# Altium PCB COF.PcbDoc (part 3 of 5)
Units mm, origin at the board's own origin, x right, y up, seen from the top; angles counter-clockwise.
Board outline 42.1 x 32.68 mm, 2 copper layers (TOP, BOTTOM), stack 0.321 mm thick; 42 components, 54 nets, 189 pads, 156 vias.
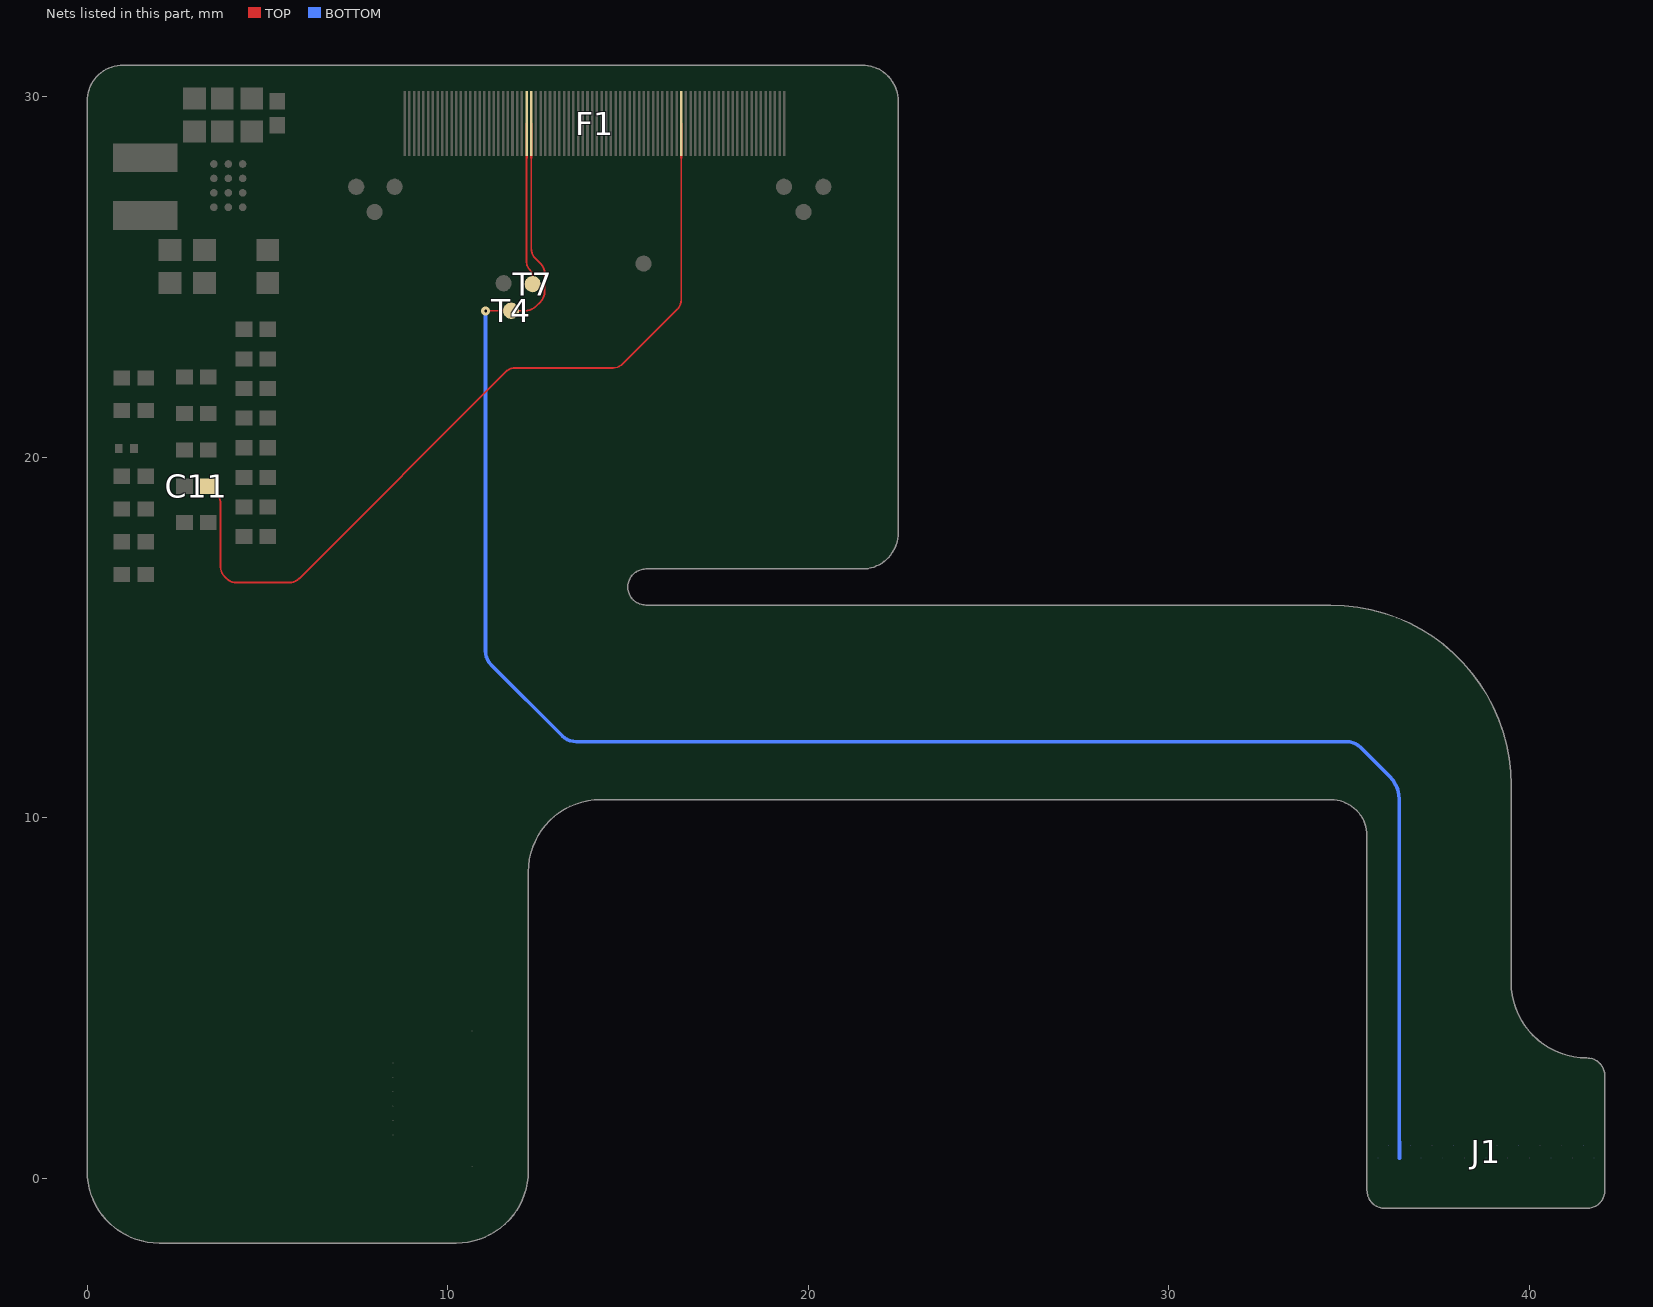
[diagram p2: the nets of this part, all layers, seen from the top]

## Via types
v1: diameter 0.25, hole 0.075, TOP to BOTTOM, tented both sides, 156 vias

## Nets (pads, with @x,y where several pads share a name; then routed paths per layer and width w, separated by ;. In a path a pad name is that pad's centre, name@x,y a point inside that pad or via, vN(x,y) a via of type N, cw(c..) or ccw(c..) an arc to the next point about the centre after c; other vN are vias at no path point) (continued)
VOTP: F1.28 J1.19 T4.1 | length 53.4
  TOP w0.05: v1(11.057,24.056) 11.061,24.06 T4.1@11.761,24.06 12.148,24.06 ccw(c12.148,24.492) 12.453,24.187 12.579,24.313 ccw(c12.307,24.585) 12.692,24.585 12.692,25.098 ccw(c12.307,25.098) 12.579,25.37 12.435,25.514 cw(c12.706,25.787) 12.321,25.787 12.321,28.301
  TOP w0.07: 12.321,28.301 F1.28@12.321,29.251
  BOTTOM w0.1: v1(11.057,24.056) ccw(c11.602,23.983) 11.052,23.984 11.052,14.623 ccw(c11.602,14.623) 11.212,14.235 13.178,12.269 13.18,12.267 ccw(c13.567,12.658) 13.567,12.108 34.94,12.108 34.942,12.108 cw(c34.94,11.558) 35.328,11.948 36.129,11.147 cw(c35.473,10.493) 36.399,10.494 36.399,1.527 J1.19@36.407,0.557
VREF: C11.1 F1.60 | length 23.5
  TOP w0.05: C11.1@3.363,19.192 3.568,19.007 3.589,18.986 cw(c3.317,18.713) 3.702,18.713 3.702,16.958 ccw(c4.087,16.958) 3.814,16.687 3.87,16.631 ccw(c4.141,16.904) 4.141,16.519 5.608,16.519 ccw(c5.608,16.904) 5.88,16.631 11.613,22.364 cw(c11.885,22.092) 11.885,22.477 14.589,22.477 ccw(c14.589,22.862) 14.861,22.589 16.369,24.098 ccw(c16.096,24.369) 16.481,24.369 16.481,28.301
  TOP w0.07: 16.481,28.301 F1.60@16.481,29.251
VREGOUT: F1.27 T7.1 | length 4.5
  TOP w0.05: 12.191,28.301 12.192,25.674 12.192,25.413 ccw(c12.495,25.413) 12.281,25.198 cw(c12.085,25.002) 12.362,25.002 T7.1@12.362,24.798
  TOP w0.07: 12.191,28.301 12.191,28.351 12.191,28.386 F1.27@12.191,29.251
pads on no net: F1.6 F1.11 F1.46 F1.50 F1.51 F1.52 F1.53 F1.54 F1.55 F1.72 F1.74 F1.77 J1.16

## Polygon pours and split planes (outlines as drawn)
GND on TOP "BOTTOM-No Net 1" (solid, pour order 21): 0.102,0.197 0.102,29.876 cw(c1,29.876) 1,30.774 21.5,30.774 cw(c21.5,29.876) 22.398,29.876 22.398,17.897 cw(c21.5,17.897) 21.5,16.999 15.5,16.999 ccw(c15.5,16.397) 15.731,15.841 15.731,11.702 14.619,10.591 ccw(c14.34,8.754) 14.062,10.591 ccw(c14.24,8.497) 12.138,8.497 12.138,0.197 cw(c10.24,0.197) 10.24,-1.701 2,-1.701 cw(c2,0.197)
GND on TOP "BOTTOM-No Net" (hatched 45Degree grid 0.508 track 0.203, pour order 22): 14.627,10.599 15.642,11.614 15.643,11.614 ccw(c15.5,11.757) 15.702,11.757 15.702,15.795 34.504,15.795 cw(c34.504,10.897) 39.403,10.897 39.403,5.434 ccw(c41.604,5.434) 41.604,3.232 cw(c41.604,2.834) 42.003,2.834 42.003,-0.341 cw(c41.604,-0.341) 41.604,-0.74 36.004,-0.74 cw(c36.004,-0.341) 35.606,-0.341 35.606,9.497 ccw(c34.504,9.497) 34.504,10.599
ELVDD on TOP "ELVDD_L01_P017" (solid, pour order 17): 1.992,26.047 2.8,26.047 2.8,26.8 3.004,26.961 3.122,27.03 3.583,27.03 3.583,25.437 1.992,25.437
ELVSS on TOP "ELVSS_L01_P014" (solid, pour order 14): 3.814,28.128 3.436,28.506 3.436,28.722 3.436,29.332 4.887,29.332 4.888,29.331 4.887,28.344 4.128,28.344 4.024,28.241 4.024,28.128
VCI on TOP "VCI_L01_P010" (solid, pour order 10): 4.451,27.174 6.42,27.281 6.42,26.892 5.33,26.504 5.33,25.446 4.7,25.446 4.7,26.828 4.451,26.828
VBAT on TOP "VBAT_L01_P013" (solid, pour order 13): 4.32,28.234 4.852,28.234 4.972,28.602 4.973,29.438 5.07,29.438 5.49,29.438 5.49,28.978 5.49,28.399 5.115,28.024 4.32,28.024
GND on TOP "GND_L01_P023" (solid, pour order 23): 3.7,25.2 4.569,25.2 4.569,26.698 3.7,26.698
NetL1_2 on TOP "NETL1_2_L01_P016" (solid, pour order 16): 3.512,27.438 3.507,27.432 2.596,27.432 2.268,27.104 0.71,27.104 0.71,26.304 2.596,26.304 2.596,26.942 2.839,27.23 3.507,27.23
VBAT on TOP "VBAT_L01_P012" (solid, pour order 12): 3.51,28.231 3.289,28.452 3.289,29.33 2.659,29.33 2.519,29.19 2.098,29.19 2.098,28.899 2.765,28.899 2.765,28.373 3.117,28.021 3.51,28.021
NetL1_1 on TOP "NETL1_1_L01_P015" (solid, pour order 15): 3.535,27.832 3.535,27.831 3.053,27.831 2.532,28.352 2.532,28.698 0.732,28.698 0.732,27.898 2.386,27.898 2.662,27.621 3.535,27.621
no net on Layer0 "Default Coverlay 4 Bottom" (split plane): 2,-1.803 10.437,-1.803 10.823,-1.726 11.187,-1.575 11.515,-1.357 11.794,-1.078 12.012,-0.75 12.163,-0.386 12.24,0 12.24,0.197 12.24,8.497 12.25,8.693 12.326,9.078 12.476,9.44 12.694,9.766 12.971,10.043 13.297,10.261 13.659,10.411 14.044,10.487 14.24,10.497 34.504,10.497 34.603,10.492 34.795,10.454 34.976,10.379 35.139,10.27 35.278,10.131 35.386,9.968 35.461,9.787 35.5,9.595 35.504,9.497 35.504,-0.341 35.504,-0.441 35.581,-0.624 35.721,-0.765 35.905,-0.841 36.004,-0.841 41.604,-0.841 41.704,-0.841 41.888,-0.765 42.028,-0.624 42.104,-0.441 42.104,-0.341 42.104,2.834 42.104,2.933 42.028,3.117 41.888,3.258 41.704,3.334 41.604,3.334 41.399,3.344 40.995,3.424 40.615,3.582 40.272,3.81 39.981,4.102 39.752,4.444 39.595,4.824 39.515,5.228 39.504,5.434 39.504,10.897 39.504,11.225 39.419,11.875 39.249,12.508 38.998,13.113 38.671,13.681 38.272,14.201 37.808,14.664 37.288,15.063 36.721,15.391 36.115,15.642 35.482,15.811 34.832,15.897 34.504,15.897 15.5,15.897 15.402,15.907 15.222,15.981 15.084,16.119 15.01,16.299 15.01,16.495 15.084,16.675 15.222,16.813 15.402,16.887 15.5,16.897 21.5,16.897 21.599,16.897 21.792,16.935 21.974,17.011 22.137,17.12 22.277,17.26 22.386,17.423 22.462,17.605 22.5,17.798 22.5,29.974 22.462,30.167 22.386,30.349 22.277,30.513 22.137,30.652 21.974,30.762 21.792,30.837 21.599,30.876 21.5,30.876 1,30.876 0.902,30.876 0.708,30.837 0.526,30.762 0.363,30.652 0.223,30.513 0.114,30.349 0.038,30.167 0,29.974 0,29.876 0,0.197 0,0 0.077,-0.386 0.228,-0.75 0.447,-1.078 0.725,-1.357 1.053,-1.575 1.417,-1.726 1.803,-1.803
GND on BOTTOM "BOTTOM-No Net 1" (solid, remove dead copper, pour order 19): 0.102,0.197 0.102,29.876 cw(c1,29.876) 1,30.774 21.5,30.774 cw(c21.5,29.876) 22.398,29.876 22.398,17.897 cw(c21.5,17.897) 21.5,16.999 15.5,16.999 ccw(c15.5,16.397) 15.785,15.867 15.785,11.757 14.619,10.591 ccw(c14.34,8.752) 14.062,10.591 ccw(c14.24,8.497) 12.138,8.497 12.138,0.197 cw(c10.24,0.197) 10.24,-1.701 2,-1.701 cw(c2,0.197)
GND on BOTTOM "BOTTOM-No Net" (hatched 45Degree grid 0.508 track 0.203, remove dead copper, pour order 20): 14.627,10.599 15.642,11.614 15.643,11.614 ccw(c15.5,11.757) 15.702,11.757 15.702,15.795 34.504,15.795 cw(c34.504,10.897) 39.403,10.897 39.403,5.434 ccw(c41.604,5.434) 41.604,3.232 cw(c41.604,2.834) 42.003,2.834 42.003,-0.341 cw(c41.604,-0.341) 41.604,-0.74 36.004,-0.74 cw(c36.004,-0.341) 35.606,-0.341 35.606,9.497 ccw(c34.504,9.497) 34.504,10.599
no net on Layer0 "Default Coverlay 4 Top" (split plane): 2,-1.803 10.437,-1.803 10.823,-1.726 11.187,-1.575 11.515,-1.357 11.794,-1.078 12.012,-0.75 12.163,-0.386 12.24,0 12.24,0.197 12.24,8.497 12.25,8.693 12.326,9.078 12.476,9.44 12.694,9.766 12.971,10.043 13.297,10.261 13.659,10.411 14.044,10.487 14.24,10.497 34.504,10.497 34.603,10.492 34.795,10.454 34.976,10.379 35.139,10.27 35.278,10.131 35.386,9.968 35.461,9.787 35.5,9.595 35.504,9.497 35.504,-0.341 35.504,-0.441 35.581,-0.624 35.721,-0.765 35.905,-0.841 36.004,-0.841 41.604,-0.841 41.704,-0.841 41.888,-0.765 42.028,-0.624 42.104,-0.441 42.104,-0.341 42.104,2.834 42.104,2.933 42.028,3.117 41.888,3.258 41.704,3.334 41.604,3.334 41.399,3.344 40.995,3.424 40.615,3.582 40.272,3.81 39.981,4.102 39.752,4.444 39.595,4.824 39.515,5.228 39.504,5.434 39.504,10.897 39.504,11.225 39.419,11.875 39.249,12.508 38.998,13.113 38.671,13.681 38.272,14.201 37.808,14.664 37.288,15.063 36.721,15.391 36.115,15.642 35.482,15.811 34.832,15.897 34.504,15.897 15.5,15.897 15.402,15.907 15.222,15.981 15.084,16.119 15.01,16.299 15.01,16.495 15.084,16.675 15.222,16.813 15.402,16.887 15.5,16.897 21.5,16.897 21.599,16.897 21.792,16.935 21.974,17.011 22.137,17.12 22.277,17.26 22.386,17.423 22.462,17.605 22.5,17.798 22.5,29.974 22.462,30.167 22.386,30.349 22.277,30.513 22.137,30.652 21.974,30.762 21.792,30.837 21.599,30.876 21.5,30.876 1,30.876 0.902,30.876 0.708,30.837 0.526,30.762 0.363,30.652 0.223,30.513 0.114,30.349 0.038,30.167 0,29.974 0,29.876 0,0.197 0,0 0.077,-0.386 0.228,-0.75 0.447,-1.078 0.725,-1.357 1.053,-1.575 1.417,-1.726 1.803,-1.803

## Keep-outs
Keep-Out Layer:
  circle w0.006: c6.12,-1.803 r0.003
  circle w0.006: c6.12,-1.803 r0.003
  lines w0.013: 36.004,-0.841 cw(c36.004,-0.341) 35.504,-0.341 35.504,2.159 35.504,9.497 ccw(c34.504,9.497) 34.504,10.497 14.24,10.497 ccw(c14.24,8.497) 12.24,8.497 12.24,0.197 cw(c10.24,0.197) 10.24,-1.803 2,-1.803 cw(c2,0.197) 0,0.197 0,29.876 cw(c1,29.876) 1,30.876 21.5,30.876 cw(c21.5,29.876) 22.5,29.876 22.5,17.897 cw(c21.5,17.897) 21.5,16.897 15.5,16.897 ccw(c15.5,16.397) 15.5,15.897 34.504,15.897 cw(c34.504,10.897) 39.504,10.897 39.504,5.434 ccw(c41.604,5.434) 41.604,3.334 cw(c41.604,2.834) 42.104,2.834 42.104,-0.341 cw(c41.604,-0.341) 41.604,-0.841 ; 36.004,-0.841 41.604,-0.841 ; 36.004,-0.841 41.604,-0.841

## Other copper
TOP:
  pour cut-out: 6.6,30.873 22.5,30.873 22.5,28.299 6.6,28.299
  pour cut-out: 3.7,25.2 4.568,25.2 4.568,24.959 3.7,24.959
  pour cut-out: 0.715,27.903 2.3,27.903 2.3,27.103 0.715,27.103
  text "TOP" at 1,-11 h3.17
BOTTOM:
  pour cut-out: 35.657,1.429 41.947,1.429 41.947,-0.841 35.657,-0.841
  text "BOT" at 1,-14.5 h3.17

## Silkscreen, mask and mechanical layers (free items; w line width, h text height)
Top Overlay:
  region: 42.104,1.609 35.504,1.609 35.504,1.709 42.104,1.709
  lines w0.013: 35.505,2.649 42.105,2.649 ; 35.505,2.649 42.105,2.649 ; 35.505,2.649 42.105,2.649 ; 35.505,2.649 42.105,2.649 ; 35.505,2.649 42.105,2.649
  text "6" at 6.329,2.871 h1
  text "1" at 6.402,0.62 h1
  text "SILKTOP" at 6.955,-11.092 h3.17
Bottom Overlay:
  lines w0.013: 35.505,2.649 42.105,2.649
  text "21" at 36.1,1.904 h0.6
  text "1" at 41.906,1.904 h0.6
  text "SILKBOT" at 6.849,-14.592 h3.17
Top Paste:
  text "PASTETOP" at 19.147,-11.092 h3.17
Bottom Paste:
  text "PASTEBOT" at 19.041,-14.592 h3.17
Top Coverlay:
  region: 6.6,30.876 22.5,30.876 22.5,28.336 6.6,28.336
  text "MASKTOP" at 34.133,-11.092 h3.17
Bottom Coverlay:
  region: 36.004,-0.841 cw(c36.004,-0.341) 35.504,-0.341 35.504,1.709 42.104,1.709 42.104,-0.341 cw(c41.604,-0.341) 41.604,-0.841
  region: 6.296,-1.803 10.24,-1.803 10.24,-1.813 10.632,-1.774 11.009,-1.66 11.357,-1.474 11.661,-1.224 11.911,-0.92 12.097,-0.572 12.211,-0.195 12.25,0.197 12.24,6.076 6.296,6.076
  region: 0.5,15.376 10,15.376 10,26.276 0.5,26.276
  lines w0.013: 35.504,-0.341 ccw(c36.004,-0.341) 36.004,-0.841 41.604,-0.841 ccw(c41.604,-0.341) 42.104,-0.341 42.104,1.709 35.504,1.709 35.504,-0.341
  text "MASKBOT" at 34.027,-14.592 h3.17
Top Assembly:
  lines w0.025: -47.057,-15.667 -43.907,-15.667 ; -47.057,25.786 -43.907,25.786 ; -47.057,67.239 -43.907,67.239 ; -4.08,-60.244 -4.08,-57.094 ; -4.08,108.666 -4.08,111.841 ; 29.067,-60.244 29.067,-57.094 ; 29.067,108.666 29.067,111.841 ; 63.027,-60.244 63.027,-57.094 ; 63.027,108.666 63.027,111.841 ; 96.174,-60.244 96.174,-57.094 ; 96.174,108.666 96.174,111.841 ; 130.108,-60.244 130.108,-57.094 ; 130.108,108.463 130.108,111.638 ; 170.596,-15.667 173.771,-15.667 ; 170.596,25.786 173.771,25.786 ; 170.596,67.239 173.771,67.239 ; -43.78,-56.993 170.596,-56.993 170.596,108.666 -43.78,108.666 -43.78,-56.993
  lines w0.076: 103.819,-57.094 103.819,-37.358
  lines w0.152: 56.448,-55.113 76.184,-55.113 ; 56.448,-53.157 76.184,-53.157 ; 56.448,-51.176 76.184,-51.176 ; 56.448,-49.195 76.184,-49.195 ; 56.448,-47.239 76.184,-47.239 ; 56.448,-45.258 76.184,-45.258 ; 56.448,-43.277 76.184,-43.277 ; 56.448,-41.321 76.184,-41.321 ; 56.448,-39.34 76.184,-39.34 ; 56.448,-37.358 76.184,-37.358 ; 56.55,-37.358 56.55,-57.094 58.124,-57.094 ; 65.617,-55.113 65.617,-37.358 ; 76.184,-57.094 76.184,-37.358 ; 76.184,-40.127 103.819,-40.127 125.13,-40.127 ; 103.819,-54.326 118.043,-54.326 125.13,-54.326 ; 103.819,-51.582 118.043,-51.582 125.13,-51.582 ; 103.819,-48.407 118.043,-48.407 125.13,-48.407 ; 103.819,-45.664 118.043,-45.664 125.13,-45.664 ; 103.819,-42.896 125.13,-42.896 ; 121.65,104.729 170.596,104.729 ; 121.65,108.666 121.65,106.71 ; 124.825,102.748 124.825,106.71 ; 125.13,-57.094 125.13,-37.358 ; 125.206,-55.113 170.596,-55.113 ; 125.206,-51.582 170.596,-51.582 ; 125.206,-42.896 170.596,-42.896 ; 128.381,-55.113 128.381,-51.582 ; 133.105,-57.094 133.105,-55.113 ; 156.397,-57.094 156.397,-55.113 ; 156.397,102.748 156.397,106.71 ; 162.722,102.748 162.722,106.71 ; 166.659,-55.113 166.659,-51.582 ; 170.596,-37.358 76.184,-37.358 ; 170.596,102.748 121.65,102.748 121.65,106.71 ; 170.596,106.71 121.65,106.71
  lines w0.406: -47.844,-53.945 -47.844,-61.057 -40.732,-61.057 ; -47.844,105.517 -47.844,112.629 -40.732,112.629 ; 167.344,-61.361 174.456,-61.361 174.456,-54.249 ; 167.446,112.629 174.558,112.629 174.558,105.517
  lines w0.432: -43.78,-56.993 170.596,-56.993 170.596,108.666 -43.78,108.666 -43.78,-56.993
  text "6" at -20.844,109.073 h1.27
  text "5" at 12.684,109.073 h1.27
  text "4" at 45.069,109.073 h1.27
  text "3" at 79.587,109.073 h1.27
  text "2" at 113.725,109.073 h1.27
  text "1" at 145.5,109.073 h1.27
  text "REVISIONS" at 139.811,107.091 h0.76
  text "NOTES:" at -41.291,105.796 h1.02
  text "DESCRIPTION" at 132.724,105.517 h0.76
  text "DATE" at 157.184,105.517 h0.76
  text "APPROVAL" at 163.509,105.517 h0.76
  text "REV" at 122.259,105.313 h0.76
  text "'.TBApprovedBy'" at 163.306,103.358 h1.02
  text "'.TBRevision'" at 122.463,103.307 h0.76
  text "Initial Release" at 125.612,103.154 h0.76
  text "'.ModifiedDate'" at 156.778,103.154 h0.76
  text "1. ASSEMBLE IN ACCORDANCE WITH IPC-610 CLASS 2." at -40.745,102.672 h1.02
  text "D" at -46.473,81.234 h1.27
  text "D" at 171.205,81.234 h1.27
  text "C" at -46.651,39.985 h1.27
  text "C" at 171.002,39.985 h1.27
  text "B" at -46.651,1.91 h1.27
  text "B" at 171.002,1.91 h1.27
  text "ASSEMBLY TOP SIDE" at 4.005,-7.132 h3.17
  text "DATE" at 119.364,-38.705 h0.64
  text "A" at -46.854,-38.933 h1.27
  text "APPROVAL" at 104.225,-38.933 h0.64
  text "A" at 170.799,-38.933 h1.27
  text "SHM" at 127.898,-41.219 h1.6
  text "DRAWN" at 104.225,-41.321 h0.64
  text "'.ModifiedDate'" at 117.941,-42.337 h0.64
  text "'.TBDrawnBy'" at 104.225,-42.413 h0.64
  text "CHECKED" at 104.225,-44.064 h0.64
  text "'.Print_Date'" at 117.941,-45.232 h0.64
  text "'.TBApprovedBy'" at 104.225,-45.309 h0.64
  text "ASSEMBLY DRAWING,PCB," at 126.298,-45.563 h1.6
  text "RELEASED" at 104.225,-46.833 h0.64
  text "'.Print_Date'" at 117.941,-47.95 h0.64
  text ".TBDrawnBy" at 104.225,-48.026 h0.64
  text "'.TBTitle'" at 126.298,-48.179 h1.6
  text "XXXXXX" at 56.854,-52.548 h0.64
  text "REV" at 167.852,-52.548 h0.76
  text "SIZE" at 125.612,-52.751 h0.76
  text "DWG NO" at 128.762,-52.751 h0.76
  text "'.TBBoardNumber'-DWG" at 135.671,-53.945 h1.6
  text "A" at 126.4,-54.326 h0.76
  text "NEXT ASSY" at 57.083,-54.503 h0.64
  text "USED ON" at 68.462,-54.503 h0.64
  text "'.TBRevision'" at 167.268,-54.503 h1.6
  text "SCALE" at 125.612,-55.926 h0.76
  text "CUST:" at 133.308,-55.926 h0.76
  text "SHEET" at 157.184,-55.926 h0.76
  text "APPLICATION" at 62.392,-56.307 h0.64
  text "1:1" at 128.762,-56.307 h0.76
  text "1 OF 2" at 161.909,-56.307 h0.76
  text "1" at 147.786,-59.787 h1.27
  text "6" at -20.844,-59.863 h1.27
  text "5" at 12.684,-59.863 h1.27
  text "4" at 45.069,-59.863 h1.27
  text "3" at 79.587,-59.863 h1.27
  text "2" at 112.353,-59.863 h1.27
Bottom Assembly:
  lines w0.025: -46.955,-15.667 -43.78,-15.667 ; -46.955,25.786 -43.78,25.786 ; -46.955,67.239 -43.78,67.239 ; -3.293,-60.244 -3.293,-57.094 ; -3.293,108.463 -3.293,111.638 ; 30.642,-60.244 30.642,-57.094 ; 30.642,108.666 30.642,111.841 ; 63.789,-60.244 63.789,-57.094 ; 63.789,108.666 63.789,111.841 ; 97.748,-60.244 97.748,-57.094 ; 97.748,108.666 97.748,111.841 ; 130.895,-60.244 130.895,-57.094 ; 130.895,108.666 130.895,111.841 ; 170.723,-15.667 173.872,-15.667 ; 170.723,25.786 173.872,25.786 ; 170.723,67.239 173.872,67.239 ; -43.78,-56.993 -43.78,108.666 170.596,108.666 170.596,-56.993 -43.78,-56.993
  lines w0.152: -43.78,-55.113 1.609,-55.113 ; -43.78,-51.582 1.609,-51.582 ; -43.78,-42.896 1.609,-42.896 ; -43.78,-37.358 1.686,-37.358 1.686,-57.094 ; -39.843,-55.113 -39.843,-51.582 ; -29.582,-57.094 -29.582,-55.113 ; -6.29,-57.094 -6.29,-55.113 ; -1.566,-55.113 -1.566,-51.582 ; 68.691,-57.094 70.266,-57.094
  lines w0.406: -47.743,105.517 -47.743,112.629 -40.631,112.629 ; -47.641,-54.249 -47.641,-61.361 -40.529,-61.361 ; 167.548,-61.057 174.66,-61.057 174.66,-53.945 ; 167.548,112.629 174.66,112.629 174.66,105.517
  lines w0.432: -43.78,-56.993 -43.78,108.666 170.596,108.666 170.596,-56.993 -43.78,-56.993
  text "1" at -18.685,109.073 h1.27
  text "2" at 13.09,109.073 h1.27
  text "3" at 47.228,109.073 h1.27
  text "4" at 81.746,109.073 h1.27
  text "5" at 114.131,109.073 h1.27
  text "6" at 147.659,109.073 h1.27
  text "D" at -44.39,81.234 h1.27
  text "D" at 173.288,81.234 h1.27
  text "C" at -44.187,39.985 h1.27
  text "C" at 173.466,39.985 h1.27
  text "B" at -44.187,1.91 h1.27
  text "B" at 173.466,1.91 h1.27
  text "ASSEMBLY BOTTOM SIDE" at 37.406,-7.132 h3.17
  text "A" at -43.984,-38.933 h1.27
  text "A" at 173.669,-38.933 h1.27
  text "SHM" at -1.083,-41.219 h1.6
  text "ASSEMBLY DRAWING,PCB," at 0.517,-45.563 h1.6
  text "'.TBTitle'" at 0.517,-48.179 h1.6
  text "REV" at -41.037,-52.548 h0.76
  text "DWG NO" at -1.947,-52.751 h0.76
  text "SIZE" at 1.203,-52.751 h0.76
  text "'.TBBoardNumber'-DWG" at -8.855,-53.945 h1.6
  text "A" at 0.416,-54.326 h0.76
  text "'.TBRevision'" at -40.11,-54.656 h1.6
  text "SHEET" at -30.369,-55.926 h0.76
  text "CUST:" at -6.493,-55.926 h0.76
  text "SCALE" at 1.203,-55.926 h0.76
  text "2 OF 2" at -35.094,-56.307 h0.76
  text "1:1" at -1.947,-56.307 h0.76
  text "1" at -20.971,-59.787 h1.27
  text "2" at 14.462,-59.863 h1.27
  text "3" at 47.228,-59.863 h1.27
  text "4" at 81.746,-59.863 h1.27
  text "5" at 114.131,-59.863 h1.27
  text "6" at 147.659,-59.863 h1.27
Mechanical 4:
  region: 36.004,-0.841 cw(c36.004,-0.341) 35.504,-0.341 35.504,2.649 42.105,2.649 42.104,-0.341 cw(c41.604,-0.341) 41.604,-0.841
  region: 0.5,15.376 10,15.376 10,26.276 0.5,26.276
  region: 6.296,-1.803 10.24,-1.803 10.24,-1.813 10.632,-1.774 11.009,-1.66 11.357,-1.474 11.661,-1.224 11.911,-0.92 12.097,-0.572 12.211,-0.195 12.25,0.197 12.24,6.076 6.296,6.076
  lines w0.2: -12.764,19.723 -4.48,19.723 -4.382,19.723 -3.313,20.792 -0.445,20.792 ; 12.713,2.065 14.265,2.065 15.626,3.426 23.911,3.426 ; 42.521,0.792 44.073,0.792 45.435,2.154 51.665,2.154
  text "钢片接地T=0.1" at -13.155,20.359 h1.52
  text "FPCB + 钢片" at -12.765,18.2 h1.52
  text "钢片接地T=0.1" at 15.235,4.062 h1.52
  text "T = 0.2 ± 0.3" at 45.043,2.674 h1.52
  text "FPCB + 钢片" at 15.625,1.903 h1.52
  text "FPCB + PI" at 45.635,0.522 h1.52
Mechanical 5:
  region: 0.5,15.376 5,15.376 6.5,23.376 6.5,30.376 0.5,30.376
Board Shape:
  lines w0.013: 36.004,-0.841 cw(c36.004,-0.341) 35.504,-0.341 35.504,2.159 35.504,9.497 ccw(c34.504,9.497) 34.504,10.497 14.24,10.497 ccw(c14.24,8.497) 12.24,8.497 12.24,0.197 cw(c10.24,0.197) 10.24,-1.803 2,-1.803 cw(c2,0.197) 0,0.197 0,29.876 cw(c1,29.876) 1,30.876 21.5,30.876 cw(c21.5,29.876) 22.5,29.876 22.5,17.897 cw(c21.5,17.897) 21.5,16.897 15.5,16.897 ccw(c15.5,16.397) 15.5,15.897 34.504,15.897 cw(c34.504,10.897) 39.504,10.897 39.504,5.434 ccw(c41.604,5.434) 41.604,3.334 cw(c41.604,2.834) 42.104,2.834 42.104,-0.341 cw(c41.604,-0.341) 41.604,-0.841 ; 36.004,-0.841 41.604,-0.841 ; 36.004,-0.841 41.604,-0.841